# Allegro board INSONA_ZAP.brd
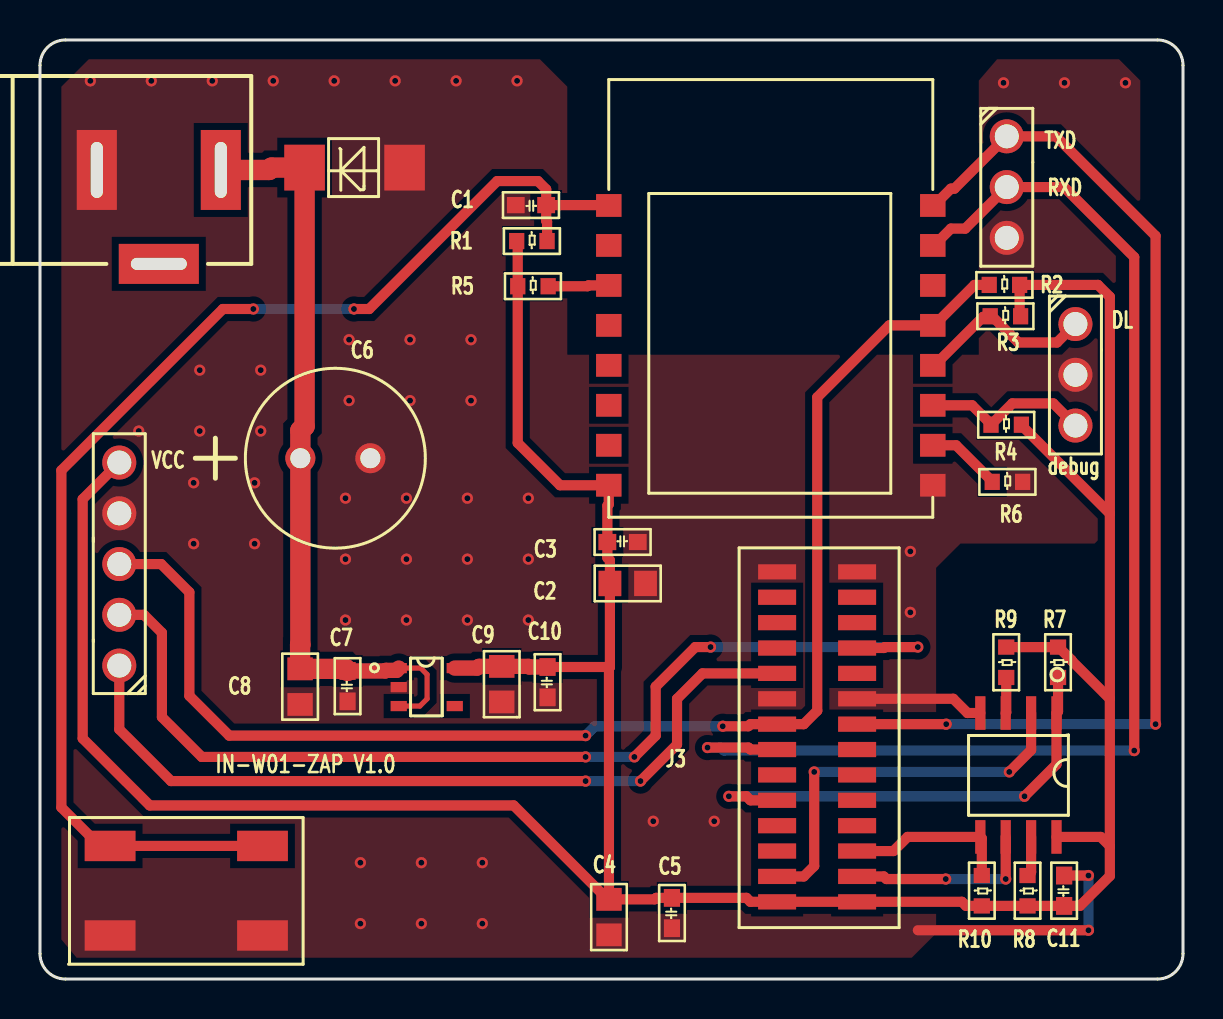
[diagram p0: board, top side]
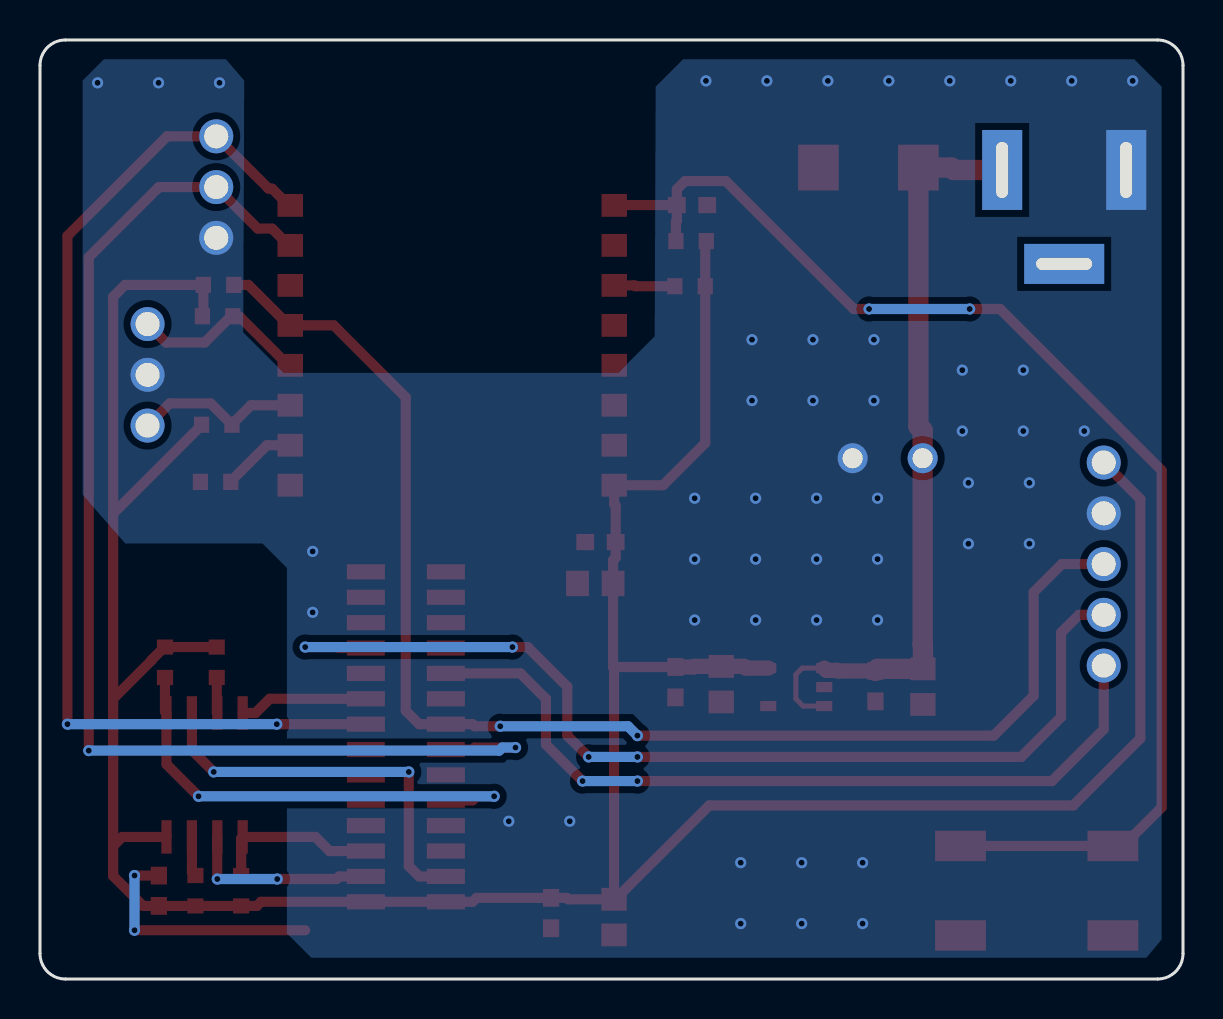
[diagram p1: board, bottom side, seen from below]

Outline 57.15 x 46.99 mm; copper layers: TOP, BOTTOM. Coordinates in mm from the lower left corner of the outline.
Outline path: 0,45.72 0,1.27 arc(0.37,0.37) 1.27,0 55.88,0 arc(56.78,0.37) 57.15,1.27 57.15,45.72 arc(56.78,46.62) 55.88,46.99 1.27,46.99 arc(0.37,46.62) 0,45.72

## Design rules (mm)
nets with their own width: min track width 0.41; nets +3.3V
nets with their own width: min track width 0.51; nets GND

## Placement (name value [footprint] x y rotation side)
C1  0.1uF-SC0603  [SC0603]  24.55 38.73 180 top
C2  10uF-SC0805  [SC0805]  29.39 19.79 0 top
C3  0.1uF-SC0603  [SC0603]  29.13 21.87 0 top
C4  10uF-SC0805  [SC0805]  28.45 3.1 270 top
C5  0.1uF-SC0603  [SC0603]  31.6 3.3 90 top
C6  220uF/35v  [CAP8X11_5]  13.02 26.06 0 top
C7  0.1uF-SC0603  [SC0603]  15.38 14.66 90 top
C8  10uF-SC0805  [SC0805]  13 14.63 270 top
C9  10uF-SC0805  [SC0805]  23.09 14.75 270 top
C10  0.1uF-SC0603  [SC0603]  25.38 14.85 90 top
C11  0.1uF-SC0603  [SC0603]  51.21 4.42 90 top
D1  -  [SMA]  15.73 40.6 180 top
J1  CON3  [CON1X3_254]  48.34 42.17 0 top
J2  CON3  [CON1X3_254]  51.77 32.77 0 top
J3  J14x2  [CORE_BOARD1]  36.86 3.86 270 top
J4  DC_PORT  [POWERJACK]  9.04 40.49 0 top
J5  CON5  [CON1X5_254]  3.96 15.68 180 top
R1  10K-SR0603  [SR0603]  24.59 36.93 0 top
R2  10K-SR0603  [SR0603]  48.22 34.73 0 top
R3  10K-SR0603  [SR0603]  48.27 33.16 0 top
R4  10K-SR0603  [SR0603]  48.31 27.74 0 top
R5  10K-SR0603  [SR0603]  24.65 34.67 0 top
R6  10K-SR0603  [SR0603]  48.37 24.88 0 top
R7  10K-SR0603  [SR0603]  50.9 15.85 270 top
R8  10K-SR0603  [SR0603]  49.38 4.42 270 top
R9  10K-SR0603  [SR0603]  48.31 15.85 270 top
R10  10K-SR0603  [SR0603]  47.09 4.42 270 top
U1  BUTTON  [SW-4]  7.32 4.42 90 top
U2  ESP-12s  [ESP-07-P]  28.44 38.71 270 top
U3  SPX3819  [SOT23-5]  19.34 14.61 0 top
U4  W25X20CL-SOIC8  [SO8_240_50]  48.92 10.21 270 top

## Library data of the parts
C1-C5 C7-C11 = CAP NP
C6 = C
D1 = DIODE
J1 J2 = CON3
J3 = J14*2
J4 = DC_0
J5 = CON5
R1-R10 = R
U1 = BUTTON
U2 = ESP-07
U3 = SPX3819
U4 = CAT25512

## Footprints (pads in the part's own frame, mm; a bottom-side part is the same pattern mirrored in y, then rotated)
CAP8X11_5
  round 1.5 hole 1: 1(0,0) 2(3.5,0)
CON1X3_254
  round 1.7 hole 1.2: 1(0,0) 2(0,-2.54) 3(0,-5.08)
CON1X5_254
  round 1.7 hole 1.2: 1(0,0) 2(0,-2.54) 3(0,-5.08) 4(0,-7.62) 5(0,-10.16)
CORE_BOARD1
  rect 0.76x1.9 smd: 1(0,0) 2(0,4) 3(-1.27,0) 4(-1.27,4) 5(-2.54,0) 6(-2.54,4) 7(-3.81,0) 8(-3.81,4) 9(-5.08,0) 10(-5.08,4) 11(-6.35,0) 12(-6.35,4) 13(-7.62,0) 14(-7.62,4) 15(-8.89,0) 16(-8.89,4) 17(-10.16,0) 18(-10.16,4) 19(-11.43,0) 20(-11.43,4) 21(-12.7,0) 22(-12.7,4) 23(-13.97,0) 24(-13.97,4) 25(-15.24,0) 26(-15.24,4) 27(-16.51,0) 28(-16.51,4)
ESP-07-P
  rect 1.14x1.27 smd: 1(0,0) 2(2,0) 3(4,0) 4(6,0) 5(8,0) 6(10,0) 7(12,0) 8(14,0) 9(14,16.2) 10(12,16.2) 11(10,16.2) 12(8,16.2) 13(6,16.2) 14(4,16.2) 15(2,16.2) 16(0,16.2)
POWERJACK
  rect 2x4 hole 0.6x2.8: 1(0,0) 2(-6.2,0)
  rect 4x2 hole 2.8x0.6: 3(-3.1,-4.7)
SC0603
  rect 0.89x0.81 smd: 1(-0.76,0) 2(0.76,0)
SC0805
  rect 1.14x1.27 smd: 1(-0.89,0) 2(0.89,0)
SMA
  rect 2.03x2.29 smd: 1(-2.5,0) 2(2.5,0)
SO8_240_50
  rect 1.68x0.51 smd: 1(-3.1,1.905) 2(-3.1,0.635) 3(-3.1,-0.635) 4(-3.1,-1.905) 5(3.1,-1.905) 6(3.1,-0.635) 7(3.1,0.635) 8(3.1,1.905)
SOT23-5
  rect 0.81x0.51 smd: 1(-1.4,0.95) 2(-1.4,0) 3(-1.4,-0.95) 4(1.4,-0.95) 5(1.4,0.95)
SR0603
  rect 0.76x0.81 smd: 1(-0.76,0) 2(0.76,0)
SW-4
  rect 1.52x2.54 smd: 1(-2.24,3.81) 2(2.24,3.81) 3(-2.24,-3.81) 4(2.24,-3.81)

## Nets
+3.3V: C2.1 C3.1 C4.1 C5.2 C9.1 C10.2 C11.1 J3.1 J3.2 J5.5 R1.1 R2.2 R3.2 R4.2 R5.1 R7.1 R8.2 R9.1 R10.2 U2.8(VCC) U3.5(VOUT) U4.8(VCC)
+5V: C6.1 C7.2 C8.1 D1.2(K) J4.1 U3.1(VI N) U3.3(EN)
GND: C1.2 C2.2 C3.2 C4.2 C5.1 C6.2 C7.1 C8.2 C9.2 C10.1 C11.2 D1.1(A) J1.3 J2.2 J3.17 J3.18 J3.27 J3.28 J4.2 J5.4 R6.2 U1.1 U1.3 U2.9(GND) U3.2(GND) U4.4(VSS)
CLK: J3.4 U4.6(SCK)
GPIO0: J2.1 R3.1 U2.12(GPIO0)
GPIO4: J3.15 J5.3 R2.1 U2.13(GPIO4)
IO2: J2.3 R4.1 U2.11(GPIO2)
JTCK: J3.19 J5.1
JTMS: J3.22 J5.2
MISO: J3.3 U4.2(SO)
MOSI: J3.6 R10.1 U4.5(SI)
NCS: J3.9 R7.2 U4.1(/CS)
RXD: J1.2 J3.13 U2.15(RXD)
TXD: J1.1 J3.16 U2.16(TXD)
N01603: R6.1 U2.10(GPIO15)
N01932: C1.1 R1.2 U1.2 U1.4 U2.1(RESET)
N02127: R5.2 U2.3(CH_PD)
N1020801: R9.2 U4.3(/WP)
N1020827: R8.1 U4.7(/HOLD)

Pads without a net: J3 5 7 8 10 11 12 14 20 21 23 24 25 26; J4 3; U2 2 4 5 6 7 14; U3 4

## Via types
v1: diameter 0.56, hole 0.3, TOP to BOTTOM, 70 vias

## Routing (per net, layer and track width the routed paths; a pad name or vN(x,y) marks a point on that pad's centre or on a via; arc(x,y) is an arc through that point)
+3.3V: length 165
  TOP w0.508: 28.5,15.61 28.45,15.57 C4.1 ; 28.5,15.61 C2.1 28.5,20.95 28.37,21.08 C3.1 28.37,23.68 28.44,23.75 U2.8 26,24.71 23.89,26.82 R5.1 23.89,36.87 R1.1 ; 28.5,15.61 C10.2 ; 53.49,23.29 49.07,27.71 R4.2 ; 53.49,23.29 53.49,34.14 52.9,34.73 R2.2 48.98,33.21 R3.2 ; 53.49,23.29 53.49,14.02 ; J5.5 2.13,24.01 2.13,12.04 5.49,8.69 23.68,8.69 28.38,3.99 C4.1 ; U4.8 53.04,7.11 53.49,6.65 ; 53.49,6.65 53.49,14.02 ; 53.49,6.65 53.49,5.16 52,3.66 C11.1 R8.2 R10.2 46.3,3.66 46.1,3.86 J3.2 J3.1 35.52,3.86 35.32,4.06 C5.2 30.81,4.06 30.74,3.99 C4.1 ; 53.49,14.02 51.58,15.93 51.58,15.96 50.93,16.61 R7.1 R9.1
  TOP w0.762: U3.5 21.86,15.56 21.94,15.64 C9.1 24.43,15.64 24.46,15.61 C10.2
+5V: length 38.8
  TOP w0.254: U3.3 18.99,13.66 19.35,14.02 19.35,15.24 19.04,15.56 U3.1
  TOP w0.762: U3.1 17.82,15.45 17.29,15.45 17.26,15.42 C7.2
  TOP w1.016: J4.1 11.46,40.49 11.58,40.6 D1.2 13.23,27.66 13.02,27.45 C6.1 13.02,16.74 13,16.73 C8.1 15.27,15.52 C7.2
GND: length 19
  TOP w0.508: J3.18 45.66,14.02 46.38,13.31 U4.4 ; C11.2 v1(52.42,5.18) ; 44.7,24.71 U2.9 ; v1(52.42,2.44) 43.89,2.44
  BOTTOM w0.508: v1(52.42,5.18) v1(52.42,2.44)
  vias: v1(2.52,44.94) v1(4.94,27.42) v1(5.57,44.94) v1(7.68,24.83) v1(7.68,21.78) v1(7.99,30.47) v1(7.99,27.42) v1(8.61,44.94) v1(10.73,24.83) v1(10.73,21.78) v1(11.03,30.47) v1(11.03,27.42) v1(11.66,44.94) v1(14.71,44.94) v1(15.27,24.06) v1(15.27,21.01) v1(15.27,17.96) v1(15.45,31.99) v1(15.45,28.94) v1(16.02,5.82) v1(16.02,2.77) v1(17.76,44.94) v1(18.32,24.06) v1(18.32,21.01) v1(18.32,17.96) v1(18.5,31.99) v1(18.5,28.94) v1(19.07,5.82) v1(19.07,2.77) v1(20.81,44.94) v1(21.37,24.06) v1(21.37,21.01) v1(21.37,17.96) v1(21.55,31.99) v1(21.55,28.94) v1(22.12,5.82) v1(22.12,2.77) v1(23.85,44.94) v1(24.42,24.06) v1(24.42,21.01) v1(24.42,17.96) v1(30.66,7.9) v1(33.71,7.9) v1(43.52,21.4) v1(43.52,18.35) v1(48.18,44.85) v1(51.22,44.85) v1(54.27,44.85)
CLK: length 9.6
  TOP w0.508: U4.6 v1(48.29,5) ; J3.4 42.19,5.13 42.32,5 v1(45.29,5)
  BOTTOM w0.508: v1(48.29,5) v1(45.29,5)
GPIO0: length 9.1
  TOP w0.508: U2.12 44.73,30.71 47.16,33.14 47.51,33.14 ; 47.51,33.14 R3.1 ; 47.51,33.14 47.63,33.14 48.92,31.85 50.85,31.85 J2.1
GPIO4: length 68.6
  TOP w0.508: J5.3 6.06,20.76 7.47,19.35 7.47,14.17 9.46,12.18 v1(27.28,12.18) ; v1(34.14,12.65) 35.42,12.65 35.52,12.75 J3.15 38.19,12.75 38.86,13.43 38.86,29.11 42.46,32.71 U2.13 44.7,32.71 46.73,34.73 R2.1
  BOTTOM w0.508: v1(27.28,12.18) 27.75,12.65 v1(34.14,12.65)
IO2: length 8.4
  TOP w0.508: R4.1 47.55,27.76 ; 47.55,27.76 47.57,27.76 48.62,28.8 50.66,28.8 J2.3 ; 47.55,27.76 46.6,28.71 U2.11
JTCK: length 40.7
  TOP w0.508: v1(30.02,9.91) 31.85,11.73 31.85,14.02 33.12,15.29 J3.19 ; v1(27.28,9.91) 6.55,9.91 3.96,12.5 J5.1
  BOTTOM w0.508: v1(30.02,9.91) v1(27.28,9.91)
JTMS: length 52.1
  TOP w0.508: v1(43.89,16.61) 42.24,16.61 42.19,16.56 J3.22 ; v1(27.28,11.11) 8.09,11.11 6.1,13.11 6.1,17.33 5.2,18.22 J5.2 ; v1(33.53,16.61) 32.77,16.61 30.78,14.63 30.78,12.18 v1(29.72,11.11)
  BOTTOM w0.508: v1(33.53,16.61) v1(43.89,16.61) ; v1(27.28,11.11) v1(29.72,11.11)
MISO: length 19.9
  TOP w0.508: U4.2 49.56,11.46 v1(48.46,10.36) ; J3.3 38.19,5.13 38.71,5.65 v1(38.71,10.36)
  BOTTOM w0.508: v1(48.46,10.36) v1(38.71,10.36)
MOSI: length 8.4
  TOP w0.508: R10.1 47.09,7.03 U4.5 43.38,7.11 42.67,6.4 J3.6
NCS: length 23.9
  TOP w0.508: J3.9 35.52,8.94 35.32,9.14 v1(34.44,9.14) ; v1(49.23,9.14) 50.83,10.74 U4.1 50.9,13.39 R7.2
  BOTTOM w0.508: v1(49.23,9.14) v1(34.44,9.14)
RXD: length 62.3
  TOP w0.508: v1(54.71,11.43) 54.71,36.12 51.3,39.53 51.2,39.63 J1.2 46.26,37.55 45.55,37.55 44.7,36.71 U2.15 ; v1(33.38,11.58) 35.42,11.58 35.52,11.48 J3.13
  BOTTOM w0.508: v1(33.38,11.58) 34.04,11.58 34.19,11.43 v1(54.71,11.43)
TXD: length 54
  TOP w0.508: U2.16 44.7,38.71 45.55,39.55 45.72,39.55 J1.1 50.8,42.17 55.78,37.19 v1(55.78,12.75) ; J3.16 v1(45.31,12.75)
  BOTTOM w0.508: v1(45.31,12.75) v1(55.78,12.75)
N01603: length 3.7
  TOP w0.508: R6.1 47.61,24.9 45.8,26.71 U2.10
N01932: length 63.9
  TOP w0.508: C1.1 28.42,38.73 U2.1 ; C1.1 25.31,39.52 24.9,39.93 22.86,39.93 16.46,33.53 v1(15.7,33.53) ; C1.1 25.31,37.94 25.35,37.89 R1.2 ; v1(10.67,33.53) 9.14,33.53 1.07,25.45 1.07,8.59 3,6.66 U1.2 U1.4
  BOTTOM w0.508: v1(10.67,33.53) v1(15.7,33.53)
N02127: length 3
  TOP w0.508: R5.2 27.38,34.67 27.42,34.71 U2.3
N1020801: length 1.8
  TOP w0.508: U4.3 48.31,13.34 R9.2
N1020827: length 2
  TOP w0.508: R8.1 49.56,5.36 U4.7

## Copper pours and planes (outline as drawn; the poured copper is in the pictures)
GND on TOP: 48.03,41.01 48,40.97 47.98,40.85 48.09,40.8 48.82,40.73 49.38,40.23 50.23,40.23 53.79,36.67 53.79,22.83 52.73,21.79 46.02,21.79 44.81,20.57 44.81,2.29 43.59,1.07 1.83,1.07 1.07,1.98 1.07,44.65 2.44,46.02 24.99,46.02 26.37,44.65 26.37,31.24 46.94,31.24 46.94,44.96 47.85,46.02 53.95,46.02 55.02,44.96 55.02,24.23 53.95,23.02 53.95,38 50.39,41.56 49.38,41.56 48.81,41.06 48.06,41 ; 13 cut-outs
GND on BOTTOM: 44.81,20.57 44.81,2.29 43.59,1.07 1.83,1.07 1.07,1.98 1.07,44.65 2.44,46.02 24.99,46.02 26.37,44.65 26.42,32.16 28.19,30.38 28.19,30.33 44.96,30.33 46.99,32.36 46.94,44.96 47.85,46.02 53.95,46.02 55.02,44.96 55.02,24.23 52.88,21.79 46.02,21.79

## Text on the board
Ref Des/Silkscreen Top: VCC | TXD | RXD | debug | DL | IN-W01-ZAP V1.0
NCLEGEND-1-2: FIGURE | SIZE | 11.81 | 39.37 | 47.24 | 110.24x23.62 | DRILL CHART: TOP to BOTTOM | ALL UNITS ARE IN MILS | PLATED | QTY | 70 | 2 | 11 | 1
